# Altium PCB ARM_V2.PcbDoc (part 2 of 2)
Units mm, origin at the board's own origin, x right, y up, seen from the top; angles counter-clockwise.
Board outline 152.4 x 101.6 mm, 2 copper layers (Top Layer, Bottom Layer); 163 components, 114 nets, 562 pads, 0 vias.
Unrouted connection lines stored in the file: 405.
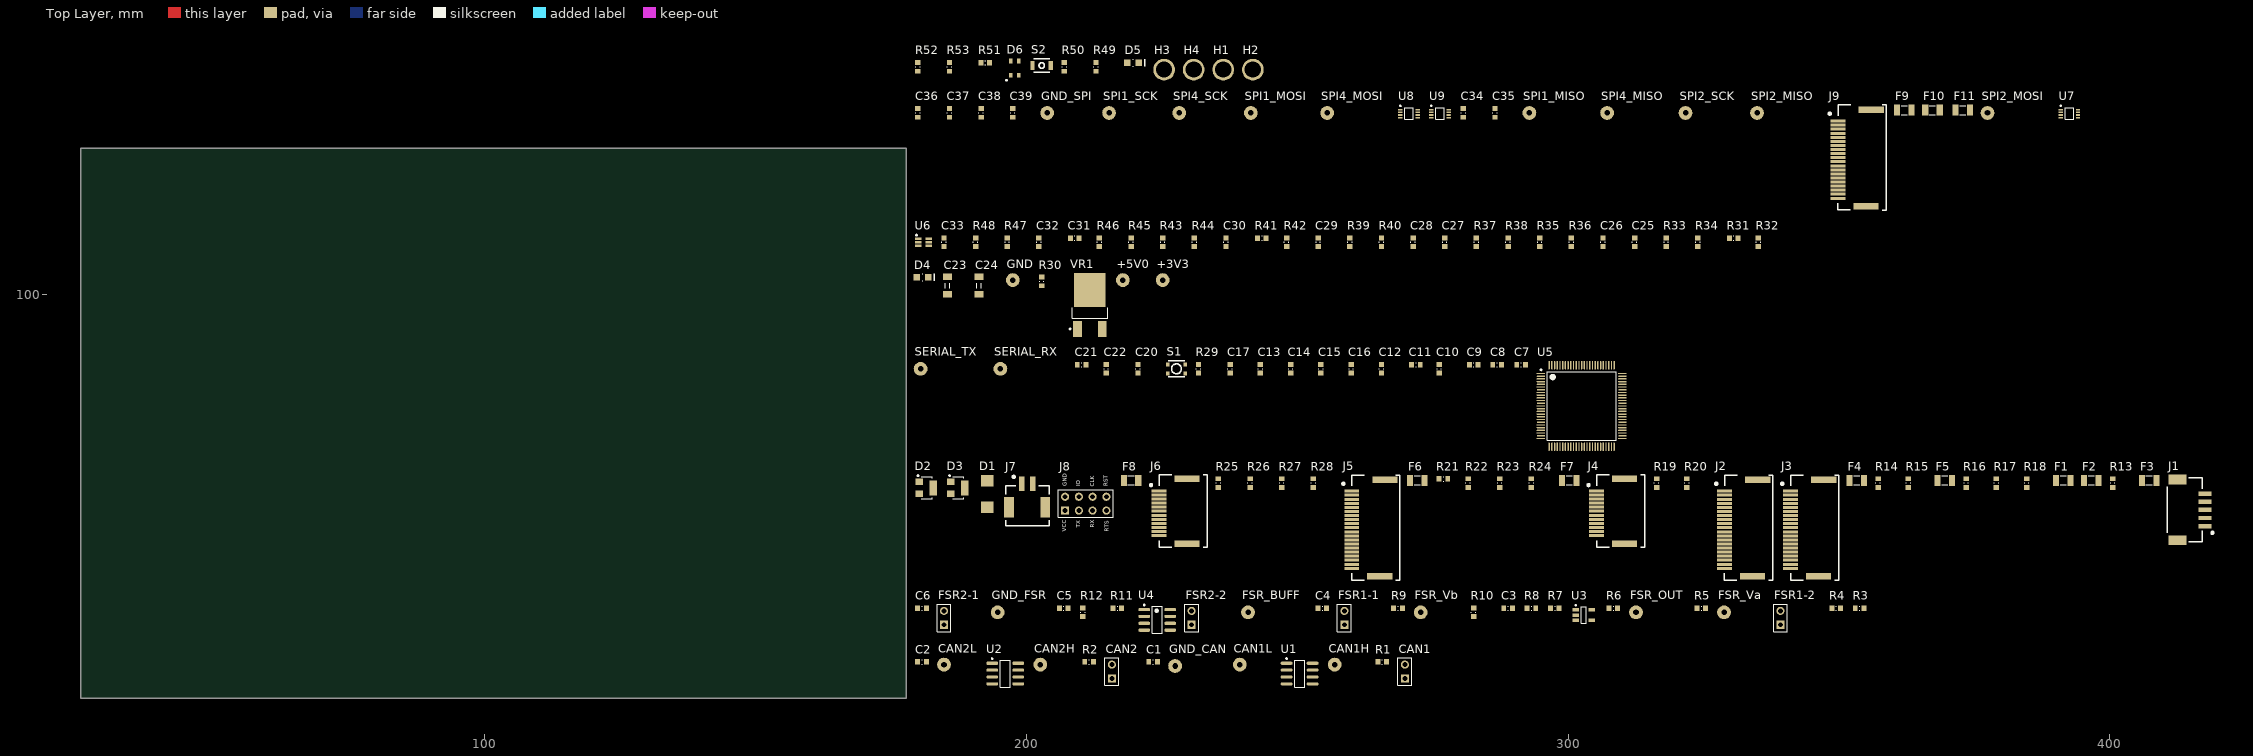
[diagram p0: Top Layer view]

## Nets (pads, with @x,y where several pads share a name; then routed paths per layer and width w, separated by ;. In a path a pad name is that pad's centre, name@x,y a point inside that pad or via, vN(x,y) a via of type N, cw(c..) or ccw(c..) an arc to the next point about the centre after c; other vN are vias at no path point) (continued)
NetR7_2: R7.2 R10.2 U3.3
NetR29_1: R29.1 U5.94
NetR49_1: R49.1 U5.8
NetR50_1: R50.1 S2.1 U5.2
NetR51_2: R51.2 U5.35
NetR52_1: R52.1 U5.9
NetR53_2: R53.2 U5.34
NetSPI1_MOSI_1: SPI1_MOSI.1 U5.91 U8.7
NetSPI1_SCK_1: SPI1_SCK.1 U5.89 U8.6
NetSPI2_MOSI_1: SPI2_MOSI.1 U5.18 U7.7
NetSPI2_SCK_1: SPI2_SCK.1 U5.47 U7.6
NetSPI4_MOSI_1: SPI4_MOSI.1 U5.5 U9.7
NetSPI4_SCK_1: SPI4_SCK.1 U5.1 U9.6
NetU1_1: U1.1 U5.71
NetU1_4: U1.4 U5.70
NetU2_1: U2.1 U5.52
NetU2_4: U2.4 U5.51
NetU5_7: U5.7
NetU5_32: U5.32 U6.4
SPI1_MOSI_5V: J9.14 U8.2
SPI1_SCK_5V: J9.15 U8.3
SPI2_MOSI_5V: J9.2 U7.2
SPI2_SCK_5V: J9.3 U7.3
SPI4_MOSI_5V: J9.8 U9.2
SPI4_SCK_5V: J9.9 U9.3
pads on no net: +5V0.1 H1.0 H2.0 H3.0 H4.0 J2.14 J3.20 J5.1 J5.2 J5.3 J5.4 J9.19 J9.20 S1.2 U1.5 U2.5 U4.1 U4.2 U4.5 U4.8 U5.3 U5.15 U5.33 U5.37 U5.41 U5.43 U5.46 U5.54 U5.66 U5.67 U5.68 U5.69 U5.77 U5.78 U5.79 U5.80 U5.81 U5.82 U5.85 U5.88 U5.92 U5.93

## Text inside footprints (layer, text, board x,y; h text height)
J8: Top Overlay "GND" at 207.437,64.517 h0.76 r90; Top Overlay "VCC" at 207.337,56.117 h0.76 r90; Top Overlay "RST" at 215.057,64.517 h0.76 r90; Top Overlay "CLK" at 212.537,64.417 h0.76 r90; Top Overlay "IO" at 209.937,64.517 h0.76 r90; Top Overlay "RTS" at 215.237,56.192 h0.76 r90; Top Overlay "RX" at 212.537,56.919 h0.76 r90; Top Overlay "TX" at 209.937,56.919 h0.76 r90